# Altium PCB PT1000焊盘.pcbdoc
Units mm, origin at the board's own origin, x right, y up, seen from the top; angles counter-clockwise.
Board outline 17.7 x 16.7 mm, 2 copper layers (Top Layer, Bottom Layer), stack 1.58 mm thick; 1 components, 0 nets, 2 pads, 0 vias.
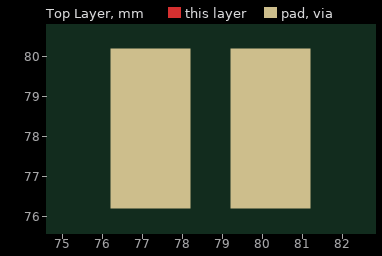
[diagram p0: Top Layer view]
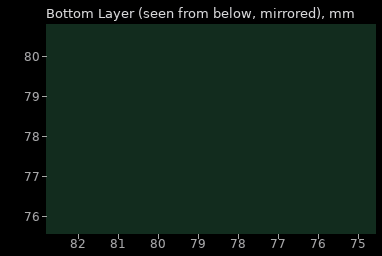
[diagram p1: Bottom Layer view, seen from below]

## Layer stack, top to bottom
Top Solder Mask Layer: solder mask 0.01, Dk 3.3
Top Layer: signal copper 0.035
Dielectric1: surface 1.51, FR4, Dk 4.5
Bottom Layer: signal copper 0.035
Bottom Solder Mask Layer: solder mask 0.01, Dk 3.3

## Board outline
87.55,69.85 69.85,69.85 69.85,86.55 87.55,86.55

## Components (designator, comment, footprint, x,y, rotation, side; value= is the part's Value field where it differs from the comment)
? "" PT1000焊盘 77.2,78.2 r0 top

## Footprints (in the part's own frame and the unit in brackets; to place one, negate y for a bottom-side part, rotate by r counter-clockwise, add the part's x,y. Pads: shape width x height; smd on the part's side, far side on the other; paste and mask are expansions set on the pad)
PT1000焊盘 [mm]
  rect 2x4 smd: 1(0,0) 2(3,0)

## Nets (pads, with @x,y where several pads share a name; then routed paths per layer and width w, separated by ;. In a path a pad name is that pad's centre, name@x,y a point inside that pad or via, vN(x,y) a via of type N, cw(c..) or ccw(c..) an arc to the next point about the centre after c; other vN are vias at no path point)
pads on no net: ?.1 ?.2